# Altium PCB Fairy_Light_Controller_PCB_v1.PcbDoc
Units mil, origin at the board's own origin, x right, y up, seen from the top; angles counter-clockwise.
Board outline 2000 x 3250 mil, 2 copper layers (Top Layer, Bottom Layer); 59 components, 39 nets, 169 pads, 27 vias.
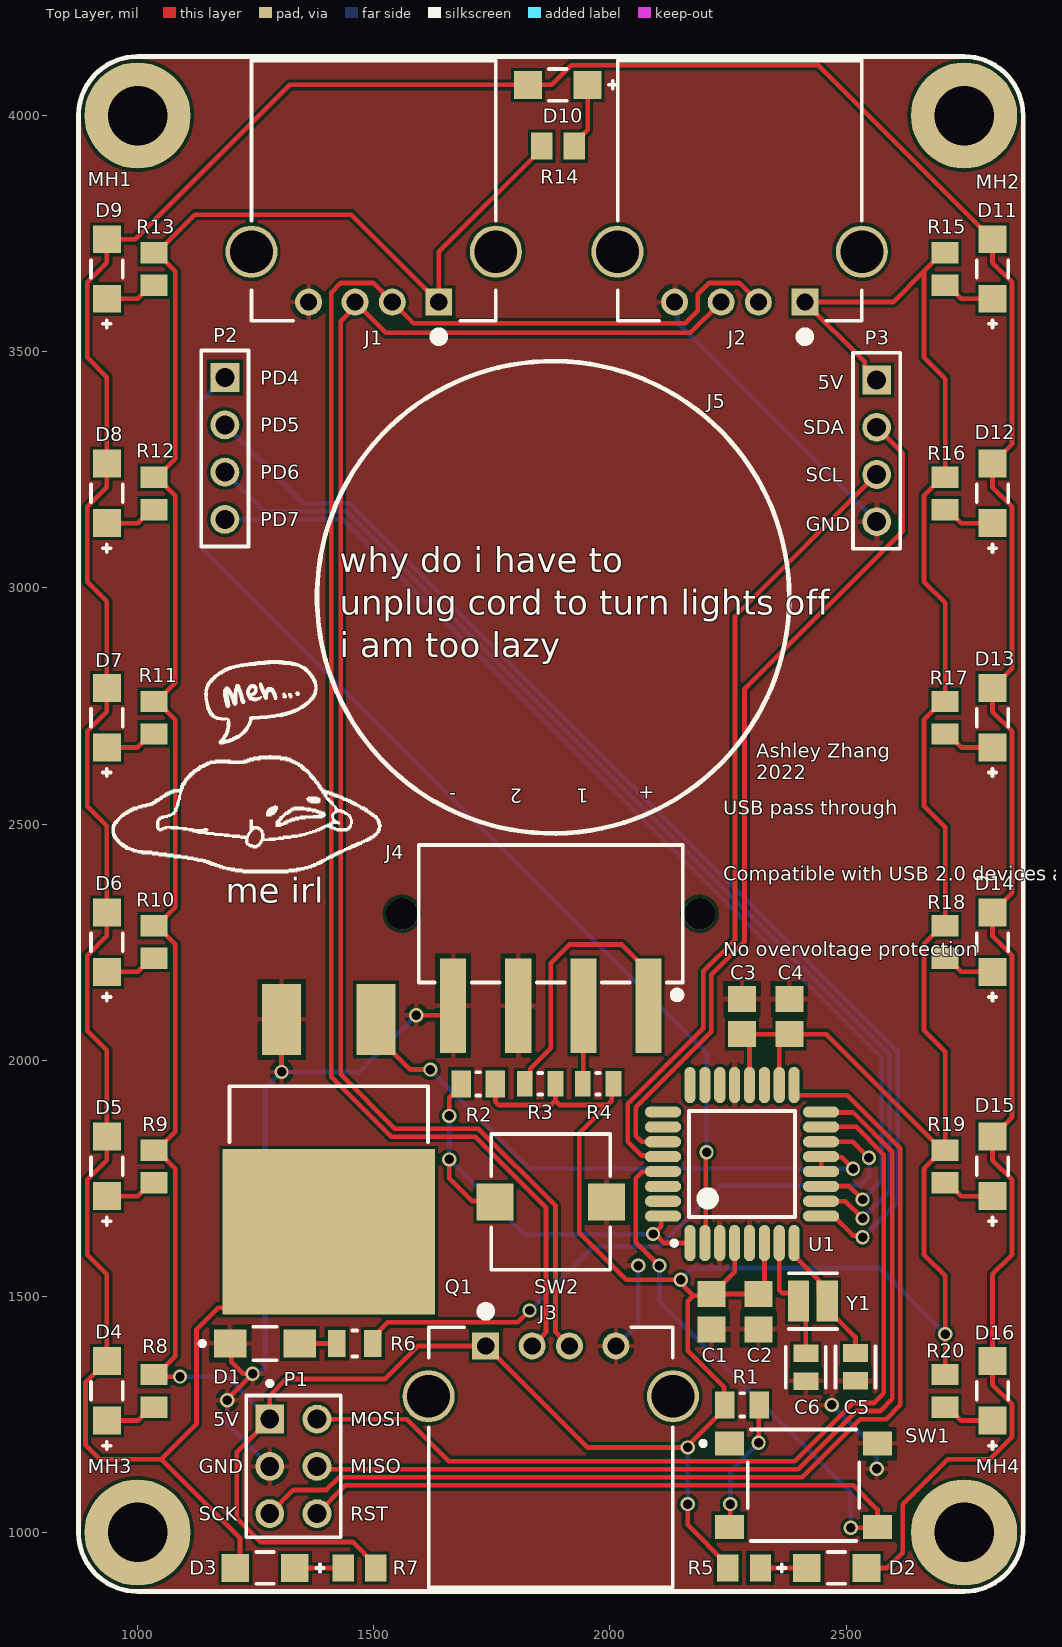
[diagram p0: Top Layer view]
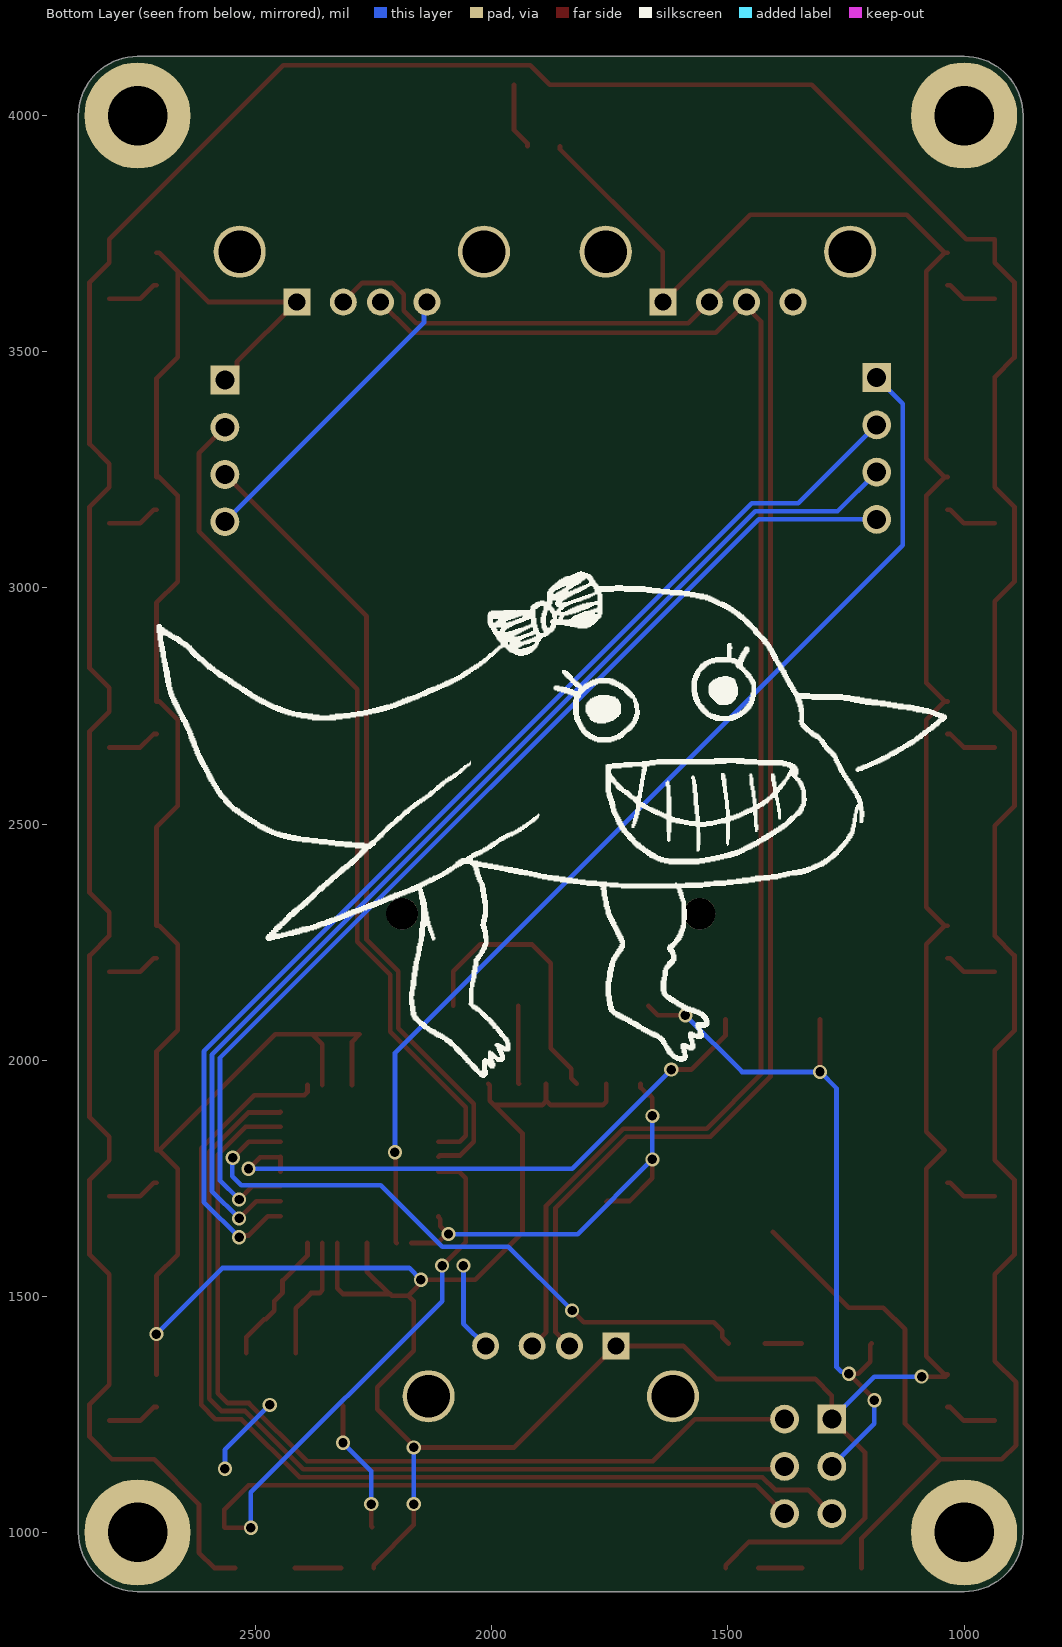
[diagram p1: Bottom Layer view, seen from below]
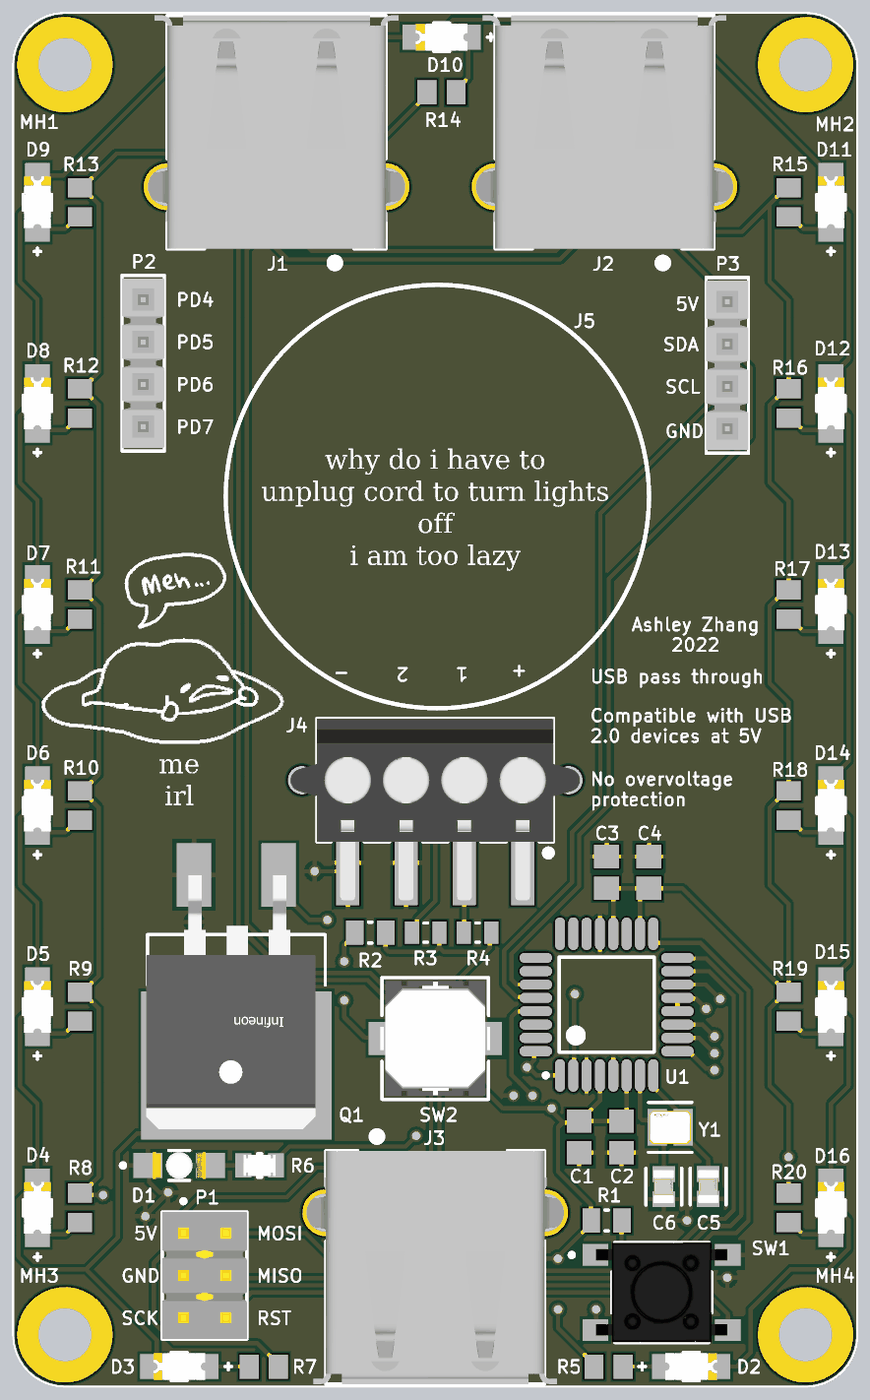
[diagram p2: 3D render of the assembled board from above, using the file's embedded part models]

## Layer stack, top to bottom
Top Solder: solder mask 0.4, Solder Resist, Dk 3.5
Top Layer: signal copper 1.4
Dielectric 1: dielectric 12.6, FR-4, Dk 4.8
Bottom Layer: signal copper 1.4
Bottom Solder: solder mask 0.4, Solder Resist, Dk 3.5

## Board outline
1000,875 cw(c1000,1000) 875,1000 875,4000 cw(c1000,4000) 1000,4125 2750,4125 cw(c2750,4000) 2875,4000 2875,1000 cw(c2750,1000) 2750,875

## Design rules (kind name [scope] priority, off if disabled: settings)
Clearance [All] p1: gap=7 ignorepadtopadclearanceinfootprint=FALSE except(0: Arc-Hole Track-Hole SMDPad-Hole THPad-Hole Via-Hole Fill-Hole Poly-Hole Region-Hole Text-Text Text-Hole)
HoleSize [All] p1: absolutevalues=TRUE maxlimit=150 minlimit=1 maxpercent=80.000 minpercent=20.000
PolygonConnect [All] p1: connectstyle=Relief reliefconductorwidth=10 reliefentries=4 polygonreliefangle="90 Angle" airgapwidth=10
RoutingVias [All] p1: holewidth=28 width=50 viastyle="Through Hole" minholewidth=28 minwidth=50 maxholewidth=28 maxwidth=50
SilkToSolderMaskClearance [IsPad] p1: minsilkscreentomaskgap=7 clearancetoexposedcopper=TRUE
SolderMaskExpansion [All] p1: expansion=4 istentingtop=FALSE
Width [All] p1: maxlimit=10 minlimit=10 preferedwidth=10
28 further rules are at their usual default settings.

## Classes and differential pairs
component class leds: D1 D2 D3 D4 D5 D6 D7 D8 D9 D10 D11 D12 D13 D14 D15 D16 Q1 R5 R6 R7 R8 R9 R10 R11 R12 R13 R14 R15 R16 R17 R18 R19 R20
component class ic: C1 C2 C3 C4 C5 C6 J5 MH1 MH2 MH3 MH4 R1 R2 SW1 SW2 U1 Y1
component class headers: J1 J2 J3 J4 P1 P2 P3 R3 R4

## Components (designator, comment, footprint, x,y, rotation, side; value= is the part's Value field where it differs from the comment)
C1 "0.1uF" CAPC2013X135X45ML10T25 2215,1467.6 r90 top
C2 "0.1uF" CAPC2013X135X45ML10T25 2315,1467.6 r90 top
C3 "0.1uF" CAPC2013X135X45ML10T25 2280,2092.4 r270 top
C4 "0.1uF" CAPC2013X135X45ML10T25 2380,2092.4 r270 top
C5 "22pF" FP-C0805C-DN-MFG 2520,1350.47 r270 top value="22 pF"
C6 "22pF" FP-C0805C-DN-MFG 2415,1350 r270 top value="22 pF"
D1 "Green" FP-APTD3216CGCK-MFG 1270,1400 r0 top value="Green LED"
D2 "White" FP-QBLP650-IW-MFG 2480,925 r0 top
D3 "White" FP-QBLP650-IW-MFG 1270,925 r180 top
D4 "White" FP-QBLP650-IW-MFG 935,1300 r90 top
D5 "White" FP-QBLP650-IW-MFG 935,1775 r90 top
D6 "White" FP-QBLP650-IW-MFG 935,2250 r90 top
D7 "White" FP-QBLP650-IW-MFG 935,2725 r90 top
D8 "White" FP-QBLP650-IW-MFG 935,3200 r90 top
D9 "White" FP-QBLP650-IW-MFG 935,3675 r90 top
D10 "White" FP-QBLP650-IW-MFG 1890,4065 r180 top
D11 "White" FP-QBLP650-IW-MFG 2810,3675 r90 top
D12 "White" FP-QBLP650-IW-MFG 2810,3200 r90 top
D13 "White" FP-QBLP650-IW-MFG 2810,2725 r90 top
D14 "White" FP-QBLP650-IW-MFG 2810,2250 r90 top
D15 "White" FP-QBLP650-IW-MFG 2810,1775 r90 top
D16 "White" FP-QBLP650-IW-MFG 2810,1300 r90 top
J1 "Input USB" TE-292303-1_V 1500,3650 r180 top
J2 "Fairy Lights USB" TE-292303-1_V 2275,3650 r180 top
J3 "Pass-through USB" TE-292303-1_V 1875,1350 r0 top
J4 "Button Header" 691508110304 1875,2310 r180 top
J5 "SV8FW3SS-601" SV8FW3SS-601 1880,2980 r0 top
MH1 "M3" PTH_M3 1000,4000 r0 top
MH2 "M3" PTH_M3 2750,4000 r0 top
MH3 "M3" PTH_M3 1000,1000 r0 top
MH4 "M3" PTH_M3 2750,1000 r0 top
P1 "ICSP" SMTC-TSW-103-08-L-D_V 1330,1140 r270 top
P2 "Debug Header 1" SMTC-TSW-104-08-X-S 1185,3445 r270 top
P3 "Debug Header 2" SMTC-TSW-104-08-X-S 2565,3440 r270 top
Q1 "LED Switch" FP-PG-TO263-3-MFG 1405,1755 r180 top
R1 "1k" RESC2013X50X30NL20T20 2280,1270 r180 top
R2 "1k" RESC2013X50X30NL20T20 1721.42,1950 r0 top
R3 "100" RESC2013X50X30LL20T20 1852.48,1950 r0 top
R4 "0" RESC2013X50X30LL20T20 1975,1950 r0 top
R5 "91" RESC2013X70X40NL20T20 2284.45,925 r180 top
R6 "220" FP-CRCW0805-e3-MFG 1460,1400 r0 top
R7 "91" RESC2013X70X40NL20T20 1470,925 r0 top
R8 "91" RESC2013X70X40NL20T20 1035,1300 r90 top
R9 "91" RESC2013X70X40NL20T20 1035,1775 r90 top
R10 "91" RESC2013X70X40NL20T20 1035,2250 r90 top
R11 "91" RESC2013X70X40NL20T20 1035,2725 r90 top
R12 "91" RESC2013X70X40NL20T20 1035,3200 r90 top
R13 "91" RESC2013X70X40NL20T20 1035,3675 r90 top
R14 "91" RESC2013X70X40NL20T20 1890,3935 r180 top
R15 "91" RESC2013X70X40NL20T20 2710,3675 r90 top
R16 "91" RESC2013X70X40NL20T20 2710,3200 r90 top
R17 "91" RESC2013X70X40NL20T20 2710,2725 r90 top
R18 "91" RESC2013X70X40NL20T20 2710,2250 r90 top
R19 "91" RESC2013X70X40NL20T20 2710,1775 r90 top
R20 "91" RESC2013X70X40NL20T20 2710,1300 r90 top
SW1 "RESET Button" FP-PTS645SM43SMTR92LFS-MFG 2410,1100 r0 top
SW2 "Toggle Button" FP-B3AL-1003P-MFG 1875,1700 r0 top
U1 "ATmega328P-AU" 32A_M 2280,1780 r90 top
Y1 "16MHz" FP-XRCHA-MFG 2430,1490 r180 top

## Footprints (in the part's own frame and the unit in brackets; to place one, negate y for a bottom-side part, rotate by r counter-clockwise, add the part's x,y. Pads: shape width x height; smd on the part's side, far side on the other; paste and mask are expansions set on the pad)
32A_M [mm] "Thin QFP, 32-Leads, Body 7x7mm, Pitch 0.8mm, IPC Low Density"
  oval 1.95x0.6 smd: 1(-4.25,2.8) 2(-4.25,2) 3(-4.25,1.2) 4(-4.25,0.4) 5(-4.25,-0.4) 6(-4.25,-1.2) 7(-4.25,-2) 8(-4.25,-2.8) 17(4.25,-2.8) 18(4.25,-2) 19(4.25,-1.2) 20(4.25,-0.4) 21(4.25,0.4) 22(4.25,1.2) 23(4.25,2) 24(4.25,2.8)
  oval 0.6x1.95 smd: 9(-2.8,-4.25) 10(-2,-4.25) 11(-1.2,-4.25) 12(-0.4,-4.25) 13(0.4,-4.25) 14(1.2,-4.25) 15(2,-4.25) 16(2.8,-4.25) 25(2.8,4.25) 26(2,4.25) 27(1.2,4.25) 28(0.4,4.25) 29(-0.4,4.25) 30(-1.2,4.25) 31(-2,4.25) 32(-2.8,4.25)
  silkscreen extent -4.37,-2.85 2.85,3.77, body extent -3.5,-3.5 3.5,3.5, height 1.2
691508110304 [mm] "WR-TBL Terminal block - serie 5081 3,50mm - SMT - Horizontal entry with rising clamp - 04p"
  rect 1.4x5.1 smd: 1(-5.25,4.95) 2(-1.75,4.95) 3(1.75,4.95) 4(5.25,4.95)
  round 1.7 hole 1.7 unplated: M1(-8,0) M2(8,0)
  silkscreen extent -7.1,-3.7 7.1,4.51, body extent -8.68,-3.7 8.68,7.2, height 11.25
CAPC2013X135X45ML10T25 [mm] "Chip Capacitor, 2-Leads, Body 2.10x1.35mm, IPC Low Density"
  rect 1.4x1.5 smd: 1(-0.95,0) 2(0.95,0)
  body extent -1.05,-0.67 1.05,0.67, height 1.35
FP-APTD3216CGCK-MFG [mm]
  rect 1.75x1.5 smd paste+0 mask+0: 1(-1.875,0) 2(1.875,0)
  silkscreen extent -3.5,-0.9 0.63,0.9, body extent -2.85,-1 2.85,1, height 0.25
FP-B3AL-1003P-MFG [mm]
  rect 2x2 smd paste+0 mask+0: 1(-3,0) 2(3,0)
  silkscreen extent -3.2,-3.65 3.2,3.65, body extent -4.1,-3.75 4.1,3.75, height 0.25
FP-C0805C-DN-MFG [mm]
  rect 0.95x1.35 smd paste+0 mask+0: 1(-0.75,0) 2(0.75,0)
  silkscreen extent -1.1,-1.07 1.1,1.07, body extent -1.4,-0.85 1.4,0.85, height 0.25
FP-CRCW0805-e3-MFG [mm]
  rect 0.95x1.45 smd paste+0 mask+0: 1(-0.975,0) 2(0.975,0)
  silkscreen extent -0.13,-0.7 0.13,0.7, body extent -1.55,-0.82 1.55,0.82, height 0.25
FP-PG-TO263-3-MFG [mm]
  rect 2.08x3.81 smd paste+0 mask+0: 1(-2.54,-8.417) 3(2.54,-8.417)
  rect 11.43x8.89 smd paste+0 mask+0: 4(0,3.013)
  silkscreen extent -5.34,-4.82 5.34,-1.81, body extent -5.81,-10.42 5.81,7.56, height 0.25
FP-PTS645SM43SMTR92LFS-MFG [mm]
  rect 1.55x1.3 smd paste+0 mask+0: 1(-3.975,2.25) 2(3.975,2.25) 3(-3.975,-2.25) 4(3.975,-2.25)
  silkscreen extent -5.52,-3 3,3, body extent -4.85,-3.1 4.85,3.1, height 0.25
FP-QBLP650-IW-MFG [mm]
  rect 1.5x1.5 smd paste+0 mask+0: 1(-1.6,0) 2(1.6,0)
  silkscreen extent -3.15,-0.85 0.48,0.85, body extent -2.45,-0.95 2.45,0.95, height 0.25
FP-XRCHA-MFG [mm]
  rect 1.15x2.2 smd paste+0 mask+0: 1(-0.775,0) 2(0.775,0)
  silkscreen extent -1.3,-1.5 1.3,1.5, body extent -1.45,-1.2 1.45,1.2, height 0.25
PTH_M3 [mm] "Plated Through Hole, M3"
  round 5.715 hole 3.2 paste+0: ""(0,0)
RESC2013X50X30LL20T20 [mm] "Chip Resistor, 2-Leads, Body 2.00x1.25mm, IPC High Density"
  rect 0.85x1.35 smd: 1(-0.825,0) 2(0.825,0)
  silkscreen extent -0.1,-0.58 0.1,0.58, body extent -1.1,-0.72 1.1,0.72, height 0.5
RESC2013X50X30NL20T20 [mm] "Chip Resistor, 2-Leads, Body 2.00x1.25mm, IPC Medium Density"
  rect 1.05x1.45 smd: 1(-0.925,0) 2(0.925,0)
  silkscreen extent -0.1,-0.63 0.1,0.63, body extent -1.1,-0.72 1.1,0.72, height 0.5
RESC2013X70X40NL20T20 [mm] "Chip Resistor, 2-Leads, Body 2.00x1.25mm, IPC Medium Density"
  rect 1.15x1.45 smd: 1(-0.875,0) 2(0.875,0)
  body extent -1.1,-0.72 1.1,0.72, height 0.7
SMTC-TSW-103-08-L-D_V [mm] "CONN, 6-Leads, Body 7.62x5.08mm, Pitch 2.54mm"
  rect 1.55x1.55 hole 1.02: 1(-2.54,-1.27)
  round 1.55 hole 1.02: 2(-2.54,1.27) 3(0,-1.27) 4(0,1.27) 5(2.54,-1.27) 6(2.54,1.27)
  silkscreen extent -4.58,-2.54 3.81,2.54, body extent -3.81,-2.54 3.81,2.54, height 8.38
SMTC-TSW-104-08-X-S [mm] ".025 SQ Post Terminal Strip Assembly, 1x4 Pins, Vertical, 2.54mm Pitch, Male"
  rect 1.55x1.55 hole 1.02: 1(0,0)
  round 1.55 hole 1.02: 2(2.54,0) 3(5.08,0) 4(7.62,0)
  silkscreen extent -1.46,-1.27 9.08,1.27, body extent -1.27,-1.27 8.89,1.27, height 8.38
SV8FW3SS-601 [mil]
  silkscreen extent -500,-500 500,500
TE-292303-1_V [mm] "THD, 4-Leads, Body 13.13x14mm, Pitch 2.5mm"
  rect 1.45x1.45 hole 0.92: 1(-3.5,1.144)
  round 1.45 hole 0.92: 2(-1,1.144) 3(1,1.144) 4(3.5,1.144)
  round 2.8 hole 2.3: 5(-6.57,-1.566) 6(6.57,-1.566)
  silkscreen extent -6.57,-11.85 6.57,3.25, body extent -8.12,-11.85 8.12,2.15, height 7.72

## Part data
C1 C2 C3 C4: library part CMP-2100-03644-1, "Chip Capacitor, 0.1 uF, +/- 10%, 50 V, -55 to 125 degC, 0805 (2012 Metric), RoHS, Tape and Reel", Capacitance=100nF, Case Code (Imperial)=0805, Case Code (Metric)=2012, Dielectric=X7R, Dielectric Material=Ceramic, Insulation Resistance=10GR, Manufacturer=Murata, Max Operating Temperature=125degC, Min Operating Temperature=-55degC, MPN=GRM21BR71H104KA01L, Package Description="2-Pin Surface Mount Device, Body 2 x 1.25 mm", Package Quantity=1, Tolerance=10%, Voltage=50V, Case/Package=0805, Datasheet URL=http://psearch.en.murata.com/capacitor/product/GRM21BR71H104KA01%23.pdf, Datasheet Version=42675.0, Depth=1.25mm, Height=1.25mm, Lead Free=LeadFree, Length=2mm, Manufacturer URL=http://www.murata.com/, Material=Ceramic, Mount=SurfaceMount, Number of Pins=2, Package Reference=0805, Packaging=TapeandReel, Radiation Hardening=No, REACH SVHC=Unknown, RoHSCompliant=true, Termination=SMD/SMT, Thickness=0.053inch, Voltage Rating=50V, Voltage Rating (DC)=50V, Width=0.049inch
C5 C6: library part CMP-2007-00448-2, "CAP CER 22PF 100V 5% NP0 0805", Capacitance="22 pF", Manufacturer=KEMET, Manufacturer Part Number=C0805C220J1GACTU, Package=C0805C-DN, Temperature="-55°C to +125°C", Temperature Characteristic=C0G, Temperature Coefficient=30ppm/°C, Temperature Range High=+125°C, Temperature Range Low=-55°C, Tolerance=0.05, Voltage Rating="100 V", Automotive=No, Category=Cap, ComponentLink2Description=Datasheet, ComponentLink2URL=https://content.kemet.com/datasheets/KEM_C1003_C0G_SMD.pdf, Device Class L1="Passive Components", Device Class L2=Capacitors, Device Class L3="Ceramic Capacitors", Digikey Description="CAP CER 22PF 100V 5% NP0 0805", Height=0.88mm, Ipc Land Pattern Name=CAPC200125X78, Lead Free=Yes, Material=Ceramic, Mouser Description="Multilayer Ceramic Capacitor, C Series, 22 Pf, - 5%, C0g / Np0, 100 V, 0805 [2012 Metric] Rohs Compliant: Yes", MPN=C0805C220J1GACTU, Octopart=https://octopart.com/c0805c220j1gactu-kemet-3791395, RoHS=TRUE
D1: library part CMP-2000-05792-2, "LED GREEN CLEAR 2SMD", Case Code (Imperial)=1206, Case Code (Metric)=3216, Forward Current=20mA, Forward Voltage=2.1V, Lens Color=Clear, Max Operating Temperature=85°C, Min Operating Temperature=-40°C, MPN=APTD3216CGCK, Package Quantity=2000, Case/Package=1206, Color=Green, Dominant Wavelength=570nm, Height=1.8mm, Illumination Color=Green, Lead Free="Lead Free", Length=3.2mm, Lens Style=Clear, Luminous Intensity=300mcd, Mount="Surface Mount", Number of LEDs=1, Number of Pins=2, Packaging="Tape and Reel", Test Current=20mA, Viewing Angle=50°, Width=1.6mm
D2 D3 D4 D5 D6 D7 D8 D9 D10 D11 D12 D13 D14 D15 D16: library part CMP-113271-000009-1, "LED WHITE CLEAR 1206 SMD", Case Code (Imperial)=1206, Case Code (Metric)=3216, Forward Voltage=3.3V, Lens Color=Colorless, MPN=QBLP650-IW, Test Current=20mA, Case/Package=1206, Color=White, Height=1.1mm, Length=3.2mm, Lens Size=1.6mm, Lens Style=Flat, Lens Transparency=Clear, Luminous Intensity=250mcd, Mount="Surface Mount", Packaging="Tape and Reel", Width=1.6mm
J1 J2 J3: library part CMP-2000-05404-1, "1 Port Right Angle Through Hole Mount Female Type A USB Connector, 4 Position, -55 to 85 degC, RoHS, Tube", Manufacturer="TE Connectivity", MPN=292303-1, Package Description="4-Pin Through Hole Device, Body 14 x 13.13 mm, Pitch 2.5 mm", Connector Mounting=PCB, Connector Type=USBA, Contact Material=Copper, Contact Plating=Gold, Contact Termination Type=Solder, Datasheet URL=http://www.farnell.com/cad/1653030.pdf, Datasheet Version=Feb-12, Gender=Receptacle, Manufacturer URL=http://www.te.com/, No. of Contacts=4, Package Reference=292303-1, SVHC=NoSVHC(16-Jun-2014)
J4: library part CMP-1502-02492-1, "Serie 5081 - 3.50 mm Horizontal Entry SMT with Rising Cage Clamp WR-TBL, 4 pin", Manufacturer="Wurth Elektronik", MPN=691508110304, Operating Temperature=-40to130degC, Datasheet URL=http://katalog.we-online.de/em/datasheet/6915081103xx.pdf, Manufacturer URL=http://www.we-online.de, Mounting Technology=SMT, Package Reference=691508110304, Packaging=TapeandReelwithCap, Part Number=691508110304, Pin Number=4, Pitch=3.50mm, Publisher=WurthElektronik
MH1 MH2 MH3 MH4: library part PTH, "M3 Plated Through Hole"
P1: library part CMP-1024-00336-5, "Male Header, Pitch 2.54 mm, 2 x 3 Position, Height 8.38 mm, Tail Length 5.08 mm, -55 to 125 degC, RoHS, Bulk", Manufacturer=Samtec, Max Operating Temperature="125 degC", Min Operating Temperature="-55 degC", MPN=TSW-103-08-L-D, ComponentLink1Description="Manufacturer URL", ComponentLink1URL=http://www.samtec.com/, ComponentLink2Description=Datasheet, ComponentLink2URL=https://datasheet.ciiva.com/25618/0900766b81154476-25618436.pdf, ComponentLink3Description="Package Specification", ComponentLink3URL=http://suddendocs.samtec.com/prints/tsw-xxx-xx-x-x-xx-xxx-footprint.pdf, DatasheetVersion=04/2012, Lead Pitch="2.54 mm", Mount="Through Hole", Mounting Technology="Through Hole", PackageDescription="Male Header, Pitch 2.54 mm, 2 x 3 Position, Height 8.38 mm, Tail Length 5.08 mm", PackageReference=TSW-103-08-L-D, RoHSCompliant=true
P2 P3: library part CMP-1024-00356-1, "0.025\" SQ Post Header, Through-hole, Vertical, -55 to 105 degC, 2.54 mm Pitch, 4-Pin, Male, RoHS", Manufacturer=Samtec, MPN=TSW-104-08-T-S, Temperature Range="-55 to 105 degC", ComponentLink1Description="Manufacturer URL", ComponentLink1URL=http://www.samtec.com, ComponentLink2Description=Datasheet, ComponentLink2URL=http://www.samtec.com/documents/webfiles/pdf/TSW_TH.PDF, ComponentLink3Description="Package Specification", ComponentLink3URL=http://www.samtec.com/documents/webfiles/cpdf/TSW-XXX-XX-XXX-X-XX-XXX-MKT.pdf, DatasheetVersion=F-214, Mounting Technology=Through-hole, Orientation=Vertical, PackageDescription=".025[0.64] SQ. Post Terminal Strip Assembly", PackageReference=TSW-104-08-X-S, PackageVersion="DM, 8/1988", PartNumber=TSW-104-08-T-S, Pitch="2.54 mm", RoHS=True
Q1: library part CMP-32901-000039-1, "MOSFET N-CH 100V 17A D2PAK", Continuous Drain Current=17A, Drain To Source Breakdown Voltage=100V, Drain To Source Resistance=90mΩ, Gate To Source Voltage=20V, Input Capacitace At Vds="920pF @ 25V", Manufacturer=Infineon, Manufacturer Part Number=IRF530NSTRLPBF, Max Forward Diode Voltage=1.3V, Max Junction Temp=+175°C, Package=PG-TO263-3, Power Dissipation=3.8W, Pulse Drain Current=60A, Temperature="-55°C to +175°C", Temperature Range Low=-55°C, Automotive=No, Category=Trans, ComponentLink2Description=Datasheet, ComponentLink2URL=https://www.infineon.com/dgdl/irf530nspbf.pdf?fileId=5546d462533600a4015355e38eb4199c, Depletion Mode=False, Device Class L1="Discrete Semiconductors", Device Class L2=Transistors, Device Class L3=MOSFETs, Digikey Description="MOSFET N-CH 100V 17A D2PAK", Drain To Source Voltage=100V, Footprint Url=https://www.infineon.com/cms/en/product/packages/PG-TO263/PG-TO263-3-901/, Gate Charge At Vgs="37nC @ 10V", Height=5.084mm, Lead Free=Yes, MPN=IRF530NSTRLPBF, Number of Channels=1, Number Of N Channels=1, Octopart=https://octopart.com/irf530nstrlpbf-infineon-65873402, Reverse Recovery Charge=320nC, Reverse Recovery Time=93ns, RoHS=TRUE, Rthja Max=40°C/W, Standoff Height=0mm, Temperature Range High=+175°C, Threshold Vgs Max=4V, Threshold Vgs Min=2V, Turn Off Delay Time=35ns, Turn On Delay Time=9.2ns
R1 R2: library part CMP-1013-00510-2, Manufacturer="Vishay Dale", MPN=CRCW08051K00FKEA, Part Number=CRCW08051K00FKEA
R3: library part CMP-2001-04901-1, Manufacturer="Vishay Dale", MPN=CRCW0805100RFKEA, Part Number=CRCW0805100RFKEA
R4: library part CMP-2001-04896-1, Manufacturer="Vishay Dale", MPN=CRCW08050000Z0EA, Part Number=CRCW08050000Z0EA
R5 R7 R8 R9 R10 R11 R12 R13 R14 R15 R16 R17 R18 R19 R20: library part CMP-2001-00454-1, Manufacturer=Panasonic, MPN=ERJ-6GEYJ910V, Part Number=ERJ-6GEYJ910V
R6: library part CMP-2001-03682-2, "RES Thick Film, 220Ω, 1%, 0.125W, 100ppm/°C, 0805", Case Code (Imperial)=0805, Case Code (Metric)=2012, Max Operating Temperature=155°C, Max Power Dissipation=125mW, Min Operating Temperature=-55°C, MPN=CRCW0805220RFKEA, Package Quantity=10, Resistance=220R, Temperature Coefficient=100ppm/°C, Tolerance=1%, Voltage Rating=150V, Case/Package=0805, Composition="Thick Film", Contact Plating=Tin, Depth=1.25mm, Features="Automotive AEC-Q200", Height=0.45mm, Lead Free="Lead Free", Length=2mm, Military Standard=Not, Mount="Surface Mount", Number of Terminations=2, Packaging="Tape and Reel", Power Rating=125mW, Radiation Hardening=No, Termination=SMD/SMT, Voltage Rating (DC)=150V, Weight=0.000194oz, Width=0.049inch
SW1: library part CMP-2000-05160-2, "SWITCH TACTILE SPST-NO 0.05A 12V", Case/Package=SMD/SMT, Color=Black, Contact Resistance=100mR, Current Rating=50mA, Max Operating Temperature=60°C, Max Voltage Rating (DC)=12V, Min Operating Temperature=-20°C, MPN=PTS645SM43SMTR92LFS, Operating Force=160gf, Package Quantity=1, Actuator Length=0.85mm, Actuator Material=Nylon, Actuator Type=Standard, Contact Material=Silver, Contact Plating=Silver, Depth=9mm, Illumination Type=Non-Illuminated, Lead Free="Lead Free", Length=6mm, Max Current Rating=50mA, Mechanical Life=100000Cycles, Mount="Surface Mount", Orientation=Straight, Packaging="Tape and Reel", REACH SVHC="No SVHC", Switch Function=Off-Mom, Termination="Gull Wing", Throw Configuration=SPST, Voltage Rating (DC)=12V
SW2: library part CMP-08834-000018-1, "SWITCH TACTILE SPST-NO 0.05A 16V", Actuator Color=White, Contact Current Rating=50mA, Contact Resistance=100mR, Max Operating Temperature=90°C, Max Voltage Rating (DC)=16V, Min Operating Temperature=-40°C, MPN=B3AL-1003P, Operating Force=3.5N, Package Quantity=1, Contact Plating=Silver, Current Rating=50mA, Depth=6.6mm, Electrical Life=1000000Cycles, Illumination Type=Non-Illuminated, Length=6.9mm, Max Current Rating=50mA, Mechanical Life=1000000Cycles, Mount="Surface Mount", Orientation=Straight, Packaging="Tape and Reel", Radiation Hardening=No, RoHS Compliant=Yes, Series=B3AL, Switch Function=Off-Mom, Switch Travel=1.3mm, Termination=SMD/SMT, Throw Configuration=SPST, Voltage Rating (DC)=16V, Weight=0.18g
U1: library part CMP-0095-00269-2, "8-bit AVR Microcontroller, 32KB Flash, 1KB EEPROM, 2KB SRAM, 32-pin TQFP, Industrial Grade (-40°C to 85°C)", Code_JEDEC=MS-026-ABA, ComponentLink1Description="Manufacturer URL", ComponentLink1URL=http://www.atmel.com/, ComponentLink2Description="ATmega48A/48PA/88A/88PA/168A/168PA/328/328P Datasheet", ComponentLink2URL=http://www.atmel.com/dyn/resources/prod_documents/doc8271.pdf, ComponentLink3Description="ATmega48A/48PA/88A/88PA/168A/168PA/328/328P Summary", ComponentLink3URL=http://www.atmel.com/dyn/resources/prod_documents/8271S.pdf, DatasheetVersion="revD, May-2011", PackageDescription="32-Lead, 7x7x1.0 mm Body, 0.8mm Lead Pitch, Thin Profile Plastic Quad Flat Package (TQFP)", PackageReference=32A, PackageVersion="revC, Oct-2010", RevisionNote="DatasheetVersion & PackageVersion updated. URLs added."
Y1: library part CMP-06054-000011-1, "CRYSTAL 16.0000MHZ 8PF SMD", Case/Package=SMD/SMT, ESR (Equivalent Series Resistance)=100R, Frequency Stability=100ppm, Load Capacitance=8pF, Max Operating Temperature=125°C, Min Operating Temperature=-40°C, MPN=XRCHA16M000F0A01R0, Package Quantity=3000, Ratings=AEC-Q200, Frequency=16MHz, Frequency Tolerance=100ppm, Height=0.031inch, Lead Pitch=1.45mm, Length=0.098inch, Mount="Surface Mount", Packaging="Tape and Reel", Termination=SMD/SMT, Tolerance=100ppm, Weight=0.000459oz, Width=0.079inch
J5: MPN=SV8FW3SS-601

## Via types
v1: diameter 30, hole 20, Top Layer to Bottom Layer, tented both sides, 27 vias

## Nets (pads, with @x,y where several pads share a name; then routed paths per layer and width w, separated by ;. In a path a pad name is that pad's centre, name@x,y a point inside that pad or via, vN(x,y) a via of type N, cw(c..) or ccw(c..) an arc to the next point about the centre after c; other vN are vias at no path point)
5V: C1.2 C2.2 C3.2 C4.2 J1.1 J2.1 J3.1 P1.1 P3.1 R1.2 R2.2 R3.2 R4.2 R5.2 R7.2 R8.2 R9.2 R10.2 R11.2 R12.2 R13.2 R14.2 R15.2 R16.2 R17.2 R18.2 R19.2 R20.2 U1.4 U1.6 U1.18 U1.20 | length 12106.1
  Top Layer w10: R10.2 R10.2@1040.91,2284.45 ; R11.2 R11.2@1040.91,2759.45 ; R12.2 R12.2@1040.91,3234.45 ; R13.2 R13.2@1040.91,3709.45 ; v1(1090,1330) 1039.45,1330 R8.2 1040.91,1334.45 1080,1373.54 1080,1770.35 1040.91,1809.45 1080,1848.54 1080,2245.35 R10.2@1040.91,2284.45 ; R7.2 1504.45,930.91 1455.35,980 1260,980 1210,1030 1210,1170 P1.1 1280,1290 1315,1325 1524.25,1325 1594.29,1395.04 J3.1 1952.24,1180 v1(2165,1180) 2165,1183.54 2242.31,1260.86 2242.31,1307.69 2165,1385 2165,1490 2176.33,1501.33 ; R2.2 1757.83,1912.17 1765,1905 1875,1905 1884.28,1914.28 ; R14.2 1855.55,3929.09 1637.8,3711.34 J1.1 1452.76,3790 1121.46,3790 R13.2@1040.91,3709.45 ; R3.2 1884.96,1913.61 1893.57,1905 1995,1905 ; R4.2 2004.28,1946.8 2004.28,1914.28 1995,1905 ; v1(2150,1535) 2035,1535 1935,1635 1935,1845 1995,1905 ; 2157.54,1520.12 2176.33,1501.33 ; v1(2165,1060) 2165,1015.91 2250,930.91 R5.2 ; U1.4 2264.25,1552.28 C1.2@2216.97,1505 ; U1.20 2295.75,2039.25 C3.2 C4.2 ; U1.6 2327.24,1517.24 C2.2 C1.2@2216.97,1505 ; U1.18 2358.74,2033.74 C4.2 ; P3.1 2539.49,3465.51 2539.49,3478.27 J2.1 2599.61,3604.96 2665,3670.35 ; R20.2 v1(2710,1420) 2710,1543.18 2665,1588.18 2665,1770.35 R19.2@2704.09,1809.45 ; R15.2 2704.09,3709.45 2665,3670.35 ; R10.2@1040.91,2284.45 1080,2323.54 1080,2720.35 R11.2@1040.91,2759.45 ; R11.2@1040.91,2759.45 1080,2798.54 1080,3195.35 R12.2@1040.91,3234.45 ; R12.2@1040.91,3234.45 1080,3273.54 1080,3670.35 R13.2@1040.91,3709.45 ; 2176.33,1501.33 2211.33,1501.33 C1.2 C1.2@2216.97,1505 ; C4.2 2458.54,2055 R19.2@2704.09,1809.45 ; 2665,3670.35 2665,3488.18 2710,3443.18 R16.2 2704.09,3234.45 2665,3195.35 2665,3013.18 2710,2968.18 R17.2 2704.09,2759.45 2665,2720.35 2665,2538.18 2710,2493.18 R18.2 2704.09,2284.45 2665,2245.35 2665,2063.18 2710,2018.18 R19.2 R19.2@2704.09,1809.45
  Bottom Layer w10: v1(1090,1330) 1190,1330 P1.1 ; v1(2150,1535) 2175,1560 2570,1560 v1(2710,1420) ; v1(2165,1060) v1(2165,1180)
D+: J1.3 J2.3 J3.3 | length 3355.5
  Top Layer w10: J3.3 1885,1424.41 1885,1691.64 1721.64,1855 1545,1855 1430,1970 1430,3564.01 1460.63,3594.64 J1.3 1525.59,3540 2170.67,3540 J2.3
D-: J1.2 J2.2 J3.2 | length 3555.6
  Top Layer w10: J3.2 1865,1424.41 1865,1687.6 1714.6,1838 1537,1838 1410,1965 1410,3625 1430.5,3645.5 1498.83,3645.5 J1.2 1584.33,3560 2160,3560 2186.42,3586.42 2186.42,3621.42 2210.5,3645.5 2273.83,3645.5 J2.2
GLOW_LEDS: Q1.1 U1.12 U1.13 | length 1270.8
  Top Layer w10: Q1.1 1505,2052.34 1577.34,1980 v1(1620,1980) ; U1.12 U1.13 2448.6,1794.47 2490.53,1794.47 v1(2515,1770)
  Bottom Layer w10: v1(1620,1980) 1830,1770 v1(2515,1770)
GND: C1.1 C2.1 C3.1 C4.1 C5.2 C6.2 D1.1 J1.4 J2.4 J3.4 J4.3 J4.4 P1.3 P3.4 Q1.3 SW1.2 SW2.2 U1.3 U1.5 U1.21 | length 2561.2
  Top Layer w10: v1(1190,1280) 1190,1282.43 v1(1243.79,1336.21) 1223.79,1336.21 1198.67,1361.33 1198.67,1397.51 D1.1 ; v1(1305,1975) Q1.3 ; v1(1590,2095) 1648.19,2095 J4.4
  Bottom Layer w10: v1(1190,1280) 1190,1230 P1.3 ; v1(1243.79,1336.21) 1247.61,1340.04 1260.04,1340.04 1270,1350 1270,1940 v1(1305,1975) 1470,1975 v1(1590,2095) ; J3.4 2060,1442.24 v1(2060,1565) ; J2.4 2143.58,3598.58 2143.58,3561.42 P3.4 ; v1(2470,1270) 2565,1175 v1(2565,1135)
LED_GND: D2.2 D3.2 D4.2 D5.2 D6.2 D7.2 D8.2 D9.2 D10.2 D11.2 D12.2 D13.2 D14.2 D15.2 D16.2 Q1.4 | length 9275.3
  Top Layer w10: D3.2@1217.01,925 1217.01,987.99 1050,1155 ; Q1.4 1244.46,1475.86 1170.86,1475.86 1125,1430 1125,1230 1050,1155 ; D2.2 2587.52,925 2620,957.48 2620,1060 2715,1155 2804.02,1155 2851.53,1202.51 2851.53,1271.51 2810,1313.03 D16.2 2810,1546.25 2851.53,1587.78 2851.53,1746.51 2810,1788.03 D15.2 2851.53,1879.52 2851.53,2221.51 2810,2263.03 D14.2 2851.53,2354.52 2851.53,2696.51 2810,2738.03 D13.2 2851.53,2829.52 2851.53,3171.51 2810,3213.03 D12.2 2851.53,3304.52 2851.53,3646.51 2810,3688.03 D11.2 2441.46,4106.53 1918.49,4106.53 1876.97,4065 D10.2 1322.4,4065 995.39,3737.99 D9.2 935,3688.03 893.47,3646.51 893.47,3487.78 935,3446.25 D8.2 935,3213.03 893.47,3171.51 893.47,3012.78 935,2971.25 D7.2 935,2738.03 893.47,2696.51 893.47,2537.78 935,2496.25 D6.2 935,2263.03 893.47,2221.51 893.47,2062.78 935,2021.25 D5.2 935,1788.03 893.47,1746.51 893.47,1587.78 935,1546.25 D4.2 890,1317.99 890,1185 920,1155 1050,1155
MISO: P1.4 U1.16 | length 1990.8
  Top Layer w10: P1.4 1386,1134 2210.97,1134 ; 2210.98,1133.99 2296.03,1133.99 2399,1134 2522,1257 2572,1257 2598,1283 2598,1806.04 2514.83,1889.21 2448.35,1889.21 U1.16
MOSI: P1.2 U1.15 | length 1958.5
  Top Layer w10: P1.2 1569.77,1240 1658.77,1151 2218.01,1151 2288.99,1150.99 2391,1151 2514,1274 2559,1274 2580,1295 2580,1800 2521.26,1858.74 U1.15
NetC5_1: C5.1 U1.8 Y1.1 | length 288.7
  Top Layer w10: U1.8 2390.24,1586.1 2442.87,1533.46 2442.87,1507.64 Y1.1 2460.51,1469.33 2478.15,1451.69 2482.01,1451.69 2520,1413.7 C5.1
NetC6_1: C6.1 U1.7 Y1.2 | length 267
  Top Layer w10: U1.7 2358.74,1512.73 2364.6,1506.87 2382.62,1506.87 Y1.2 2415,1474.49 C6.1
NetD1_2: D1.2 R6.1 | length 77.8
  Top Layer w10: D1.2 R6.1
NetD2_1: D2.1 R5.1 | length 98.1
  Top Layer w10: R5.1 D2.1
NetD3_1: D3.1 R7.1 | length 92.6
  Top Layer w10: D3.1@1342.99,925 R7.1
NetD4_1: D4.1 R8.1 | length 111.8
  Top Layer w10: D4.1 1000.55,1237.01 1029.09,1265.55 R8.1
NetD5_1: D5.1 R9.1 | length 111.8
  Top Layer w10: D5.1 1000.55,1712.01 1029.09,1740.55 R9.1
NetD6_1: D6.1 R10.1 | length 111.8
  Top Layer w10: D6.1 1000.55,2187.01 1029.09,2215.55 R10.1
NetD7_1: D7.1 R11.1 | length 111.8
  Top Layer w10: D7.1 1000.55,2662.01 1029.09,2690.55 R11.1
NetD8_1: D8.1 R12.1 | length 111.8
  Top Layer w10: D8.1 1000.55,3137.01 1029.09,3165.55 R12.1
NetD9_1: D9.1 R13.1 | length 111.8
  Top Layer w10: D9.1 1000.55,3612.01 1029.09,3640.55 R13.1
NetD10_1: D10.1 R14.1 | length 141.8
  Top Layer w10: R14.1 1924.45,3940.91 1952.99,3969.45 D10.1
NetD11_1: D11.1 R15.1 | length 111.8
  Top Layer w10: R15.1 2715.91,3640.55 2744.45,3612.01 D11.1
NetD12_1: D12.1 R16.1 | length 111.8
  Top Layer w10: R16.1 2715.91,3165.55 2744.45,3137.01 D12.1
NetD13_1: D13.1 R17.1 | length 111.8
  Top Layer w10: R17.1 2715.91,2690.55 2744.45,2662.01 D13.1
NetD14_1: D14.1 R18.1 | length 111.8
  Top Layer w10: R18.1 2715.91,2215.55 2744.45,2187.01 D14.1
NetD15_1: D15.1 R19.1 | length 111.8
  Top Layer w10: R19.1 2715.91,1740.55 2744.45,1712.01 D15.1
NetD16_1: D16.1 R20.1 | length 111.8
  Top Layer w10: R20.1 2715.91,1265.55 2744.45,1237.01 D16.1
NetJ4_1: J4.1 R3.1 | length 597.5
  Top Layer w10: R3.1 1831.73,1961.73 1831.73,1981.73 1875,2025 1875,2205 1915,2245 2024.64,2245 2081.69,2187.95 J4.1
NetJ4_2: J4.2 R4.1 | length 165.7
  Top Layer w10: R4.1 1943.9,1951.38 J4.2
NetR1_1: R1.1 SW1.3 | length 284.6
  Top Layer w10: SW1.3 2255,1012.91 v1(2255,1060) ; v1(2315,1190) 2315,1268.58 R1.1
  Bottom Layer w10: v1(2255,1060) 2255,1130 v1(2315,1190)
PD4: P2.1 U1.2 | length 2301.9
  Top Layer w10: U1.2 2203.13,1614.55 2203.13,1803.13 v1(2205,1805)
  Bottom Layer w10: P2.1 1130,3390 1130,3090 2205,2015 v1(2205,1805)
PD5: P2.2 U1.9 | length 2504.5
  Top Layer w10: U1.9 2473.9,1669.76 2514.83,1628.83 2531.17,1628.83 v1(2535,1625)
  Bottom Layer w10: P2.2 1351,3179 1449.08,3179 2609.41,2018.68 2609.41,1699.41 v1(2535,1625)
PD6: P2.3 U1.10 | length 2391.4
  Top Layer w10: U1.10 2498.74,1701.26 v1(2535,1665)
  Bottom Layer w10: P2.3 1268,3162 1442.04,3162 2592.41,2011.63 2592.41,1722.41 v1(2535,1665)
PD7: P2.4 U1.11 | length 2278.3
  Top Layer w10: U1.11 2507.24,1732.76 v1(2535,1705)
  Bottom Layer w10: P2.4 1435,3145 2575.41,2004.59 2575.41,1745.41 v1(2535,1705)
RESET: P1.6 SW1.4 U1.29 | length 2318.9
  Top Layer w10: P1.6 1440,1100 2196.89,1100 2310.11,1099.99 2515,1100 2566.5,1048.5 SW1.4 2565.08,1010 v1(2510,1010) ; v1(2105,1565) 2055,1615 2055,1750 2068.72,1763.72 2112.14,1763.72 U1.29
  Bottom Layer w10: v1(2105,1565) 2105,1490 2510,1085 v1(2510,1010)
SCL: P3.3 U1.28 | length 1718.9
  Top Layer w10: U1.28 2110.07,1798.35 2066.65,1798.35 2038,1827 2038,1908 2198,2068 2198,2188 2265,2255 2265,2940 P3.3
SCLK: P1.5 U1.17 | length 2262.7
  Top Layer w10: P1.5 1330,1090 1400,1090 1427,1117 2203.93,1117 2303.07,1116.99 ; 2303.08,1117 2407,1117 2530,1240 2585,1240 2615,1270 2615,1813.08 2502.34,1925.75 2396.53,1925.75 2390.24,1932.04 U1.17
SDA: P3.2 U1.27 | length 1819.8
  Top Layer w10: U1.27 2067.76,1827.24 2055,1840 2055,1900 2215,2060 2215,2180.96 2285,2250.96 2285,2785 2620,3120 2620,3285 P3.2
TEST_LED: R6.2 U1.14 | length 1360
  Top Layer w10: R6.2 1512.09,1413.7 1512.09,1427.09 1530,1445 1805,1445 v1(1830,1470) ; U1.14 2514.57,1827.24 v1(2548.41,1793.41)
  Bottom Layer w10: v1(1830,1470) 1965,1605 2105,1605 2235,1735 2530,1735 2549.17,1754.17 2549.17,1792.64 v1(2548.41,1793.41)
TOGGLE: R2.1 SW2.1 U1.1 U1.32 | length 960.4
  Top Layer w10: v1(1660,1790) 1660,1750 1708.38,1701.62 1755.27,1701.62 SW2.1 ; v1(1660,1882) 1660,1920.6 1665.86,1926.46 1669.33,1926.46 1685,1942.13 R2.1 ; v1@2091.59,1631.59 2108.81,1648.81 2108.81,1663.47 2112.68,1667.34 U1.32 ; v1(2091.59,1632) 2095.78,1632 2115.1,1612.68 U1.1
  Bottom Layer w10: v1(1660,1882) v1(1660,1790) 1818.41,1631.59 2091.18,1631.59 v1(2091.59,1632)
pads on no net: J1.5 J1.6 J2.5 J2.6 J3.5 J3.6 J4.M1 J4.M2 MH1. MH2. MH3. MH4. SW1.1 U1.19 U1.22 U1.23 U1.24 U1.25 U1.26 U1.30 U1.31

## Polygon pours and split planes (outlines as drawn)
GND on Top Layer "GND_L01_P000" (solid, pour order 0): 1000,875 cw(c1000,1000) 875,1000 875,4000 cw(c1000,4000) 1000,4125 2750,4125 cw(c2750,4000) 2875,4000 2875,1000 cw(c2750,1000) 2750,875

## Silkscreen, mask and mechanical layers (free items; w line width, h text height)
Top Overlay:
  drawing of 19 lines, arcs and shapes, not listed
  text "PD4" at 1260,3430 h30
  text "5V" at 2440,3420 h30
  text "PD5" at 1260,3330 h30
  text "SDA" at 2410,3325 h30
  text "PD6" at 1260,3230 h30
  text "SCL" at 2415,3225 h30
  text "PD7" at 1260,3130 h30
  text "GND" at 2415,3120 h30
  text "why do i have to / unplug cord to turn lights off / i am too lazy" at 1428.12,2835 h90
  text "Ashley Zhang / 2022" at 2310,2595 h30
  text "+" at 2095,2580 h30 r180
  text "-" at 1675,2575 h30 r180
  text "2" at 1815,2575 h30 r180
  text "1" at 1955,2575 h30 r180
  text "USB pass through" at 2240,2520 h30
  text "Compatible with USB 2.0 devices at 5V" at 2240,2380 h30
  text "me irl" at 1186.56,2315 h90
  text "No overvoltage protection" at 2240,2220 h30
  text "5V" at 1160,1225 h30
  text "MOSI" at 1450,1225 h30
  text "GND" at 1130,1125 h30
  text "MISO" at 1450,1125 h30
  text "SCK" at 1130,1025 h30
  text "RST" at 1450,1025 h30
Bottom Overlay:
  drawing of 6 lines, arcs and shapes, not listed